# Altium PCB StepperSMPS.PcbDoc
Units mm, origin at the board's own origin, x right, y up, seen from the top; angles counter-clockwise.
Board outline 476.06 x 209.87 mm, 2 copper layers (Top Layer, Bottom Layer); 43 components, 27 nets, 129 pads, 0 vias.
Unrouted connection lines stored in the file: 27.
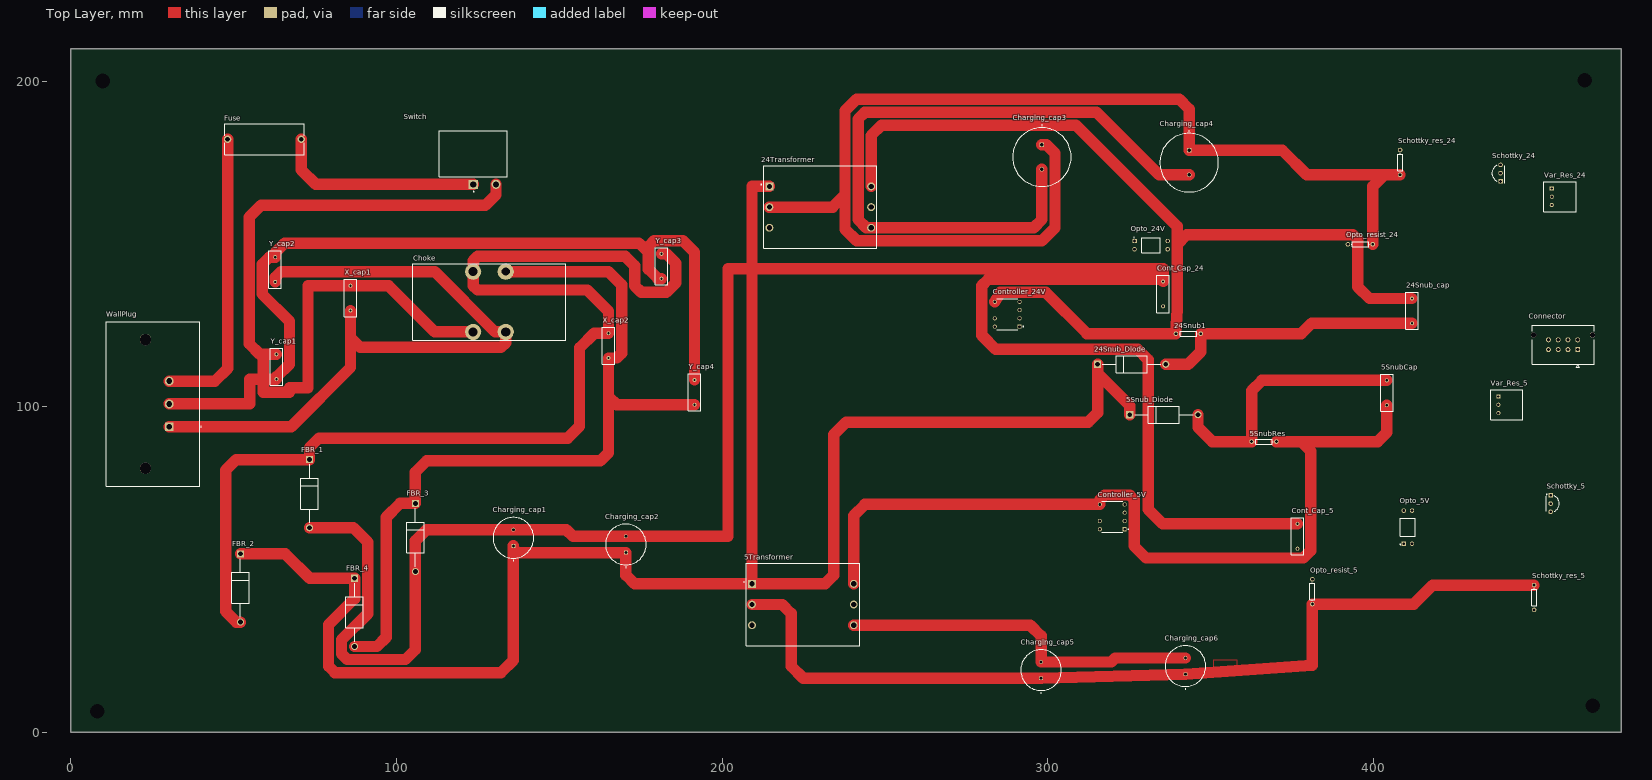
[diagram p0: Top Layer view]
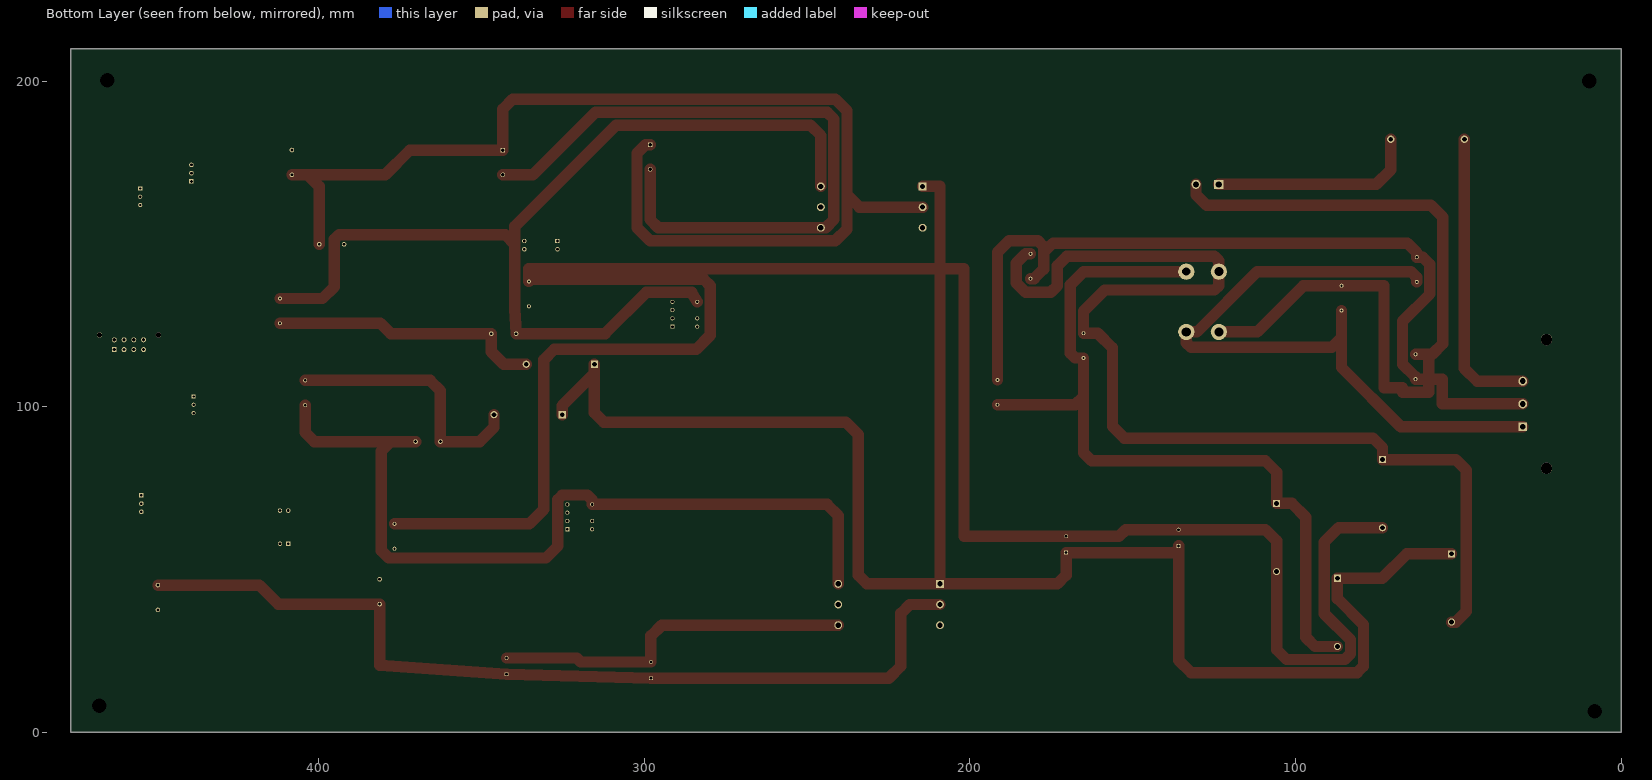
[diagram p1: Bottom Layer view, seen from below]

## Layer stack, top to bottom
Top Solder: solder mask 0.0102, Solder Resist, Dk 3.5
Top Layer: signal copper 0.0356
Dielectric 1: dielectric 0.32, FR-4, Dk 4.8
Bottom Layer: signal copper 0.0356
Bottom Solder: solder mask 0.0102, Solder Resist, Dk 3.5

## Board outline
476.059,0 476.059,209.867 0,209.867 0,0

## Design rules (kind name [scope] priority, off if disabled: settings)
BoardOutlineClearance [All] p1: gap=0.305 ignorepadtopadclearanceinfootprint=FALSE
Clearance [All] p1: gap=0.508 ignorepadtopadclearanceinfootprint=TRUE except(0.61: Arc-Via Track-Via SMDPad-Via THPad-Via Via-Via Via-Fill Via-Poly Via-Region Via-Text Via-Hole)
DiffPairsRouting [All] p1: maxlimit=0.254 minlimit=0.178 mostfreqgap=0.254 toplayer_minwidth=0.152 toplayer_maxwidth=0.381 toplayer_prefwidth=0.203 bottomlayer_minwidth=0.152 bottomlayer_maxwidth=0.381 bottomlayer_prefwidth=0.203 maxuncoupledlength=12.7
HoleSize [All] p1: absolutevalues=TRUE maxlimit=25.4 minlimit=1 maxpercent=80.000 minpercent=20.000
HoleToHoleClearance [All] p1: gap=0.432 allowstackedmicrovias=TRUE
PolygonConnect [All] p1: connectstyle=Relief reliefconductorwidth=0.254 reliefentries=4 polygonreliefangle="90 Angle" airgapwidth=0.254
RoutingLayers [All] p1: top layer_v5=TRUE bottom layer_v5=FALSE
RoutingVias [All] p1: holewidth=0.762 width=0.889 viastyle="Through Hole" minholewidth=0.254 minwidth=0.279 maxholewidth=6.477 maxwidth=6.35
SilkToSilkClearance [All] p1: silktosilkclearance=0
SolderMaskExpansion SolderMaskExpansion_1 [All] p1: expansion=0.102 istentingtop=FALSE
Width [All] p1: maxlimit=254 minlimit=0.762 preferedwidth=3.5 toplayer_minwidth=1 bottomlayer_prefwidth=1.27 minimp=50.000000 maximp=50.000000 favimp=50.000000
25 further rules are at their usual default settings.

## Components (designator, comment, footprint, x,y, rotation, side; value= is the part's Value field where it differs from the comment)
5Snub_Diode "1N5408G-T" FP-DO-201AD-MFG 335.661,97.536 r0 top
5SnubCap "Cap" RAD-0.3 404.114,104.267 r270 top value=1uF
5SnubRes "Res1" AXIAL-0.3 366.395,89.281 r0 top value=1K
5Transformer "PC-34-25" XFMR_PC-34-25 224.79,39.243 r0 top
24Snub1 "Res1" AXIAL-0.3 343.154,122.428 r180 top value=1K
24Snub_cap "Cap" RAD-0.3 411.861,129.413 r90 top value=1uF
24Snub_Diode "1N5408G-T" FP-DO-201AD-MFG 325.755,113.03 r0 top
24Transformer "PC-34-25" XFMR_PC-34-25 230.124,161.29 r0 top
Charging_cap1 "EEUED2W100" CAPPRD500W60D1250H2000 135.89,59.73 r90 top
Charging_cap2 "EEUED2W100" CAPPRD500W60D1250H2000 170.434,57.698 r90 top
Charging_cap3 "EEUED2G680" CAPPRD750W80D1800H3150 298.196,176.657 r270 top
Charging_cap4 "EEUED2G680" CAPPRD750W80D1800H3150 343.408,174.939 r270 top
Charging_cap5 "EEUED2W100" CAPPRD500W60D1250H2000 297.942,19.09 r90 top
Charging_cap6 "EEUED2W100" CAPPRD500W60D1250H2000 342.265,20.32 r90 top
Choke "7448263505" WE-CMB-XXL 128.524,132.207 r0 top
Connector "452800801" MOLEX_452800801 462.74,117.523 r0 top
Cont_Cap_5 "Cap" RAD-0.3 376.682,60.198 r90 top value=100pF
Cont_Cap_24 "Cap" RAD-0.3 335.407,134.62 r90 top value=100pF
Controller_5V "TNY268PN" DIP762W46P254L957H406Q7 319.786,66.167 r180 top
Controller_24V "TNY268PN" DIP762W46P254L957H406Q7 287.528,128.397 r180 top
FBR_1 "1N5408G-T" FP-DO-201AD-MFG 73.279,73.279 r270 top
FBR_2 "1N5408G-T" FP-DO-201AD-MFG 52.07,44.323 r270 top
FBR_3 "1N5408G-T" FP-DO-201AD-MFG 105.791,59.817 r270 top
FBR_4 "1N5408G-T" FP-DO-201AD-MFG 87.122,36.83 r270 top
Fuse "696108003002" 696108003002 59.436,182.118 r0 top
Opto_5V "VO617A-7X016" DIP1016W50P254L458H480Q4 410.591,62.992 r90 top
Opto_24V "VO617A-7X016" DIP1016W50P254L458H480Q4 331.724,149.606 r0 top
Opto_resist_5 "Res1" AXIAL-0.3 381.254,43.18 r270 top value=1K
Opto_resist_24 "Res1" AXIAL-0.3 395.986,149.86 r0 top value=1K
Schottky_5 "TL431CLP" LP0003A 454.406,70.231 r0 top
Schottky_24 "TL431CLP" LP0003A 439.039,171.704 r180 top
Schottky_res_5 "Res1" AXIAL-0.3 449.326,41.402 r90 top value=1K
Schottky_res_24 "Res1" AXIAL-0.3 408.178,175.006 r270 top value=1K
Switch "R1966ABLKBLKGR" SW_R1966ABLKBLKGR 123.556,168.275 r180 top
Var_Res_5 "3352T-1-103LF" FP-3352T-MFG 440.944,100.584 r270 top
Var_Res_24 "3352T-1-103LF" FP-3352T-MFG 457.327,164.465 r270 top
WallPlug "703W-00/52" FP-703W-00-52-MFG 25.146,100.838 r270 top
X_cap1 "Cap" RAD-0.3 85.852,133.35 r90 top value=6.6uF
X_cap2 "Cap" RAD-0.3 165.1,118.745 r90 top value=6.6uF
Y_cap1 "Cap" RAD-0.3 63.119,112.268 r90 top value=1100pF
Y_cap2 "Cap" RAD-0.3 62.738,142.113 r90 top value=1100pF
Y_cap3 "Cap" RAD-0.3 181.356,143.129 r90 top value=1100pF
Y_cap4 "Cap" RAD-0.3 191.516,104.394 r90 top value=1100pF

## Footprints (in the part's own frame and the unit in brackets; to place one, negate y for a bottom-side part, rotate by r counter-clockwise, add the part's x,y. Pads: shape width x height; smd on the part's side, far side on the other; paste and mask are expansions set on the pad)
696108003002 [mm] "FUSEHOLDER BLOCKS - PCB - CLIP COVER - THT"
  round 2.25 hole 1.5: 1(-11.3,0) 2(11.3,0)
  silkscreen extent -12.2,-4.7 12.2,4.7, body extent -12.2,-4.7 12.2,4.7, height 11.55
AXIAL-0.3 [mm] "Axial Device, Thru-Hole; 2 Leads; 0.3 in Pin Spacing"
  round 1.4 hole 0.85: 1(-3.81,0) 2(3.81,0)
  silkscreen extent -2.77,-0.76 2.77,0.76
CAPPRD500W60D1250H2000 [mm]
  round 1.2 hole 0.85: N(2.5,0)
  rect 1.2x1.2 hole 0.85: P(-2.5,0)
  silkscreen extent -7.1,-6.25 6.25,6.25, body extent -6.25,-6.25 6.25,6.25, height 20
CAPPRD750W80D1800H3150 [mm]
  round 1.4 hole 1.05: N(3.75,0)
  rect 1.4x1.4 hole 1.05: P(-3.75,0)
  silkscreen extent -9.85,-9 9,9, body extent -9,-9 9,9, height 31.5
DIP762W46P254L957H406Q7 [mm]
  rect 1.25x1.25 hole 0.83: 1(-3.81,3.81)
  round 1.25 hole 0.83: 2(-3.81,1.27) 3(-3.81,-1.27) 4(-3.81,-3.81) 5(3.81,-3.81) 7(3.81,1.27) 8(3.81,3.81)
  silkscreen extent -5.02,-4.79 3.18,4.79, body extent -4.72,-4.53 4.72,4.53, height 4.06
DIP1016W50P254L458H480Q4 [mm]
  rect 1.35x1.35 hole 0.85: 1(-5.08,1.27)
  round 1.35 hole 0.85: 2(-5.08,-1.27) 3(5.08,-1.27) 4(5.08,1.27)
  silkscreen extent -5.37,-2.29 2.8,2.43, body extent -5.21,-2.29 5.21,2.29, height 1.75
FP-703W-00-52-MFG [mm]
  rect 2.75x2.75 hole 1.8 paste-1000 mask+0: 1(7,5.05)
  round 2.75 hole 1.8 paste-1000 mask+0: 2(0,5.05) 3(-7,5.05)
  round 3.5 hole 3.5 unplated paste-1000 mask+0: ""(-19.75,-2.25) ""(19.75,-2.25)
  silkscreen extent -25.3,-14.35 25.3,14.93, body extent -25.4,-14.45 25.4,14.45, height 0.25
FP-3352T-MFG [mm]
  rect 1.25x1.25 hole 0.75 paste-1000 mask+0: 1(-2.54,-2.555)
  round 1.25 hole 0.75 paste-1000 mask+0: 2(0,-2.555) 3(2.54,-2.555)
  silkscreen extent -4.57,-4.95 4.57,4.95, body extent -4.67,-5.05 4.67,5.05, height 0.25
FP-DO-201AD-MFG [mm]
  rect 2.2x2.2 hole 1.45 paste-1000 mask+0: 1(-10.47,0)
  round 2.2 hole 1.45 paste-1000 mask+0: 2(10.47,0)
  silkscreen extent -8.97,-2.65 8.97,2.65, body extent -11.67,-2.75 11.67,2.75, height 0.25
LP0003A [mm] "TO, Flat Index; 3 In-Line, Formed Axial Leads; Body Dia. 4.8mm; Leads 0.56 x 0.41 mm (max)"
  rrect7% 1.4x1.4 hole 0.8: 1(0,2.54)
  round 1.4 hole 0.8: 2(0,0) 3(0,-2.54)
  silkscreen extent -1.35,-2.41 2.65,2.95, body extent -1.33,-2.83 2.35,2.83, height 9.01
MOLEX_452800801 [mm]
  rect 1.505x1.505 hole 1.005 mask+0.076: 1(0,0)
  round 1.505 hole 1.005 mask+0.076: 2(-3,0) 3(-6,0) 4(-9,0) 5(0,3) 6(-3,3) 7(-6,3) 8(-9,3)
  round 1.57 hole 1.57 unplated mask+0.076: ""(-13.5,4.45) ""(4.5,4.45)
  silkscreen extent -14,-5.49 5,7.45
RAD-0.3 [mm] "Radial Cap, Thru-Hole; 2 Leads; 0.3 in Pin Spacing"
  round 1.2 hole 0.7: 1(-3.81,0) 2(3.81,0)
  silkscreen extent -5.71,-1.91 5.71,1.91
SW_R1966ABLKBLKGR [mm]
  rect 2.775x2.775 hole 1.85: 1(0,0)
  round 2.775 hole 1.85: 1A(-7,0)
  silkscreen extent -10.4,-16.4 10.4,2.35, body extent -10.47,-22.2 10.47,0.6, height 14.8
WE-CMB-XXL [mm] "THT Inductor, 4-Leads, Body 43.5 x 23.5 mm"
  round 5 hole 2.8: 1(-5,-9.25) 6(5,-9.25) 12(-5,9.25)
  round 5 hole 2.5: 7(5,9.25)
  silkscreen extent -23.5,-11.75 23.5,11.75, body extent -20.64,-11.7 20.64,11.8, height 41
XFMR_PC-34-25 [mm]
  rect 2.43x2.43 hole 1.62: 1(-15.621,6.35)
  round 2.43 hole 1.62: 2(15.621,6.35) 3(-15.621,0) 4(-15.621,-6.35) 5(15.621,0) 6(15.621,-6.35)
  silkscreen extent -18.2,-12.7 17.4,12.7, body extent -5.74,-39 28.93,-13.6, height 30.56

## Part data
5Snub_Diode 24Snub_Diode FBR_1 FBR_2 FBR_3 FBR_4: library part CMP-12791-000058-1, "DIODE GEN PURP 1KV 3A DO201AD", Average Rectified Current=3A, Capacitance=40pF, Case/Package=DO-201AD, Forward Voltage=1.1V, Max Operating Temperature=150°C, Max Repetitive Reverse Voltage (Vrrm)=1kV, Max Reverse Current=5uA, Max Surge Current=125A, Min Operating Temperature=-65°C, Package Quantity=1200, Current Rating=3A, Element Configuration=Single, Forward Current=3A, Height=5.3mm, Lead Free="Lead Free", Length=9.5mm, Max Reverse Voltage (DC)=1kV, Mount="Through Hole", Number of Pins=2, Output Current=3A, Packaging="Tape and Reel", Peak Non-Repetitive Surge Current=125A, Polarity=Standard, Radiation Hardening=No, Recovery Time=2us, Reverse Recovery Time=2us, Reverse Voltage (DC)=1kV, RoHS Compliant=Yes, Series=-, Voltage Rating (DC)=1kV, Weight=0.038801oz, Width=5.3mm
5SnubCap 24Snub_cap Cont_Cap_5 Cont_Cap_24 X_cap1 X_cap2 Y_cap1 Y_cap2 Y_cap3 Y_cap4: "Capacitor", LatestRevisionDate=17-Jul-2002, LatestRevisionNote="Re-released for DXP Platform.", PackageDescription="Radial Cap, Thru-Hole; 2 Leads; 0.3 in Pin Spacing", PackageReference=RAD-0.3, Published=8-Jun-2000, Publisher="Altium Limited"
5SnubRes 24Snub1 Opto_resist_5 Opto_resist_24 Schottky_res_5 Schottky_res_24: "Resistor", LatestRevisionDate=17-Jul-2002, LatestRevisionNote="Re-released for DXP Platform.", PackageDescription="Axial Device, Thru-Hole; 2 Leads; 0.3 in Pin Spacing", PackageReference=AXIAL-0.3, Published=8-Jun-2000, Publisher="Altium Limited"
5Transformer 24Transformer: "Low Power Miniature Transformer", Package=None, Availability=Unavailable, MF="{'manufacturer': u'Signal Transformer'}", MP=PC-34-25, Price=None
Charging_cap1 Charging_cap2 Charging_cap3 Charging_cap4 Charging_cap5 Charging_cap6: "ED-A", Package=None, Availability=Unavailable, Price=None
  Charging_cap1 Charging_cap2 Charging_cap5 Charging_cap6: MF="{'manufacturer': u'Panasonic Electronic'}", MP=EEUED2W100
  Charging_cap3 Charging_cap4: MF="{'manufacturer': u'Panasonic'}", MP=EEUED2G680
Choke: library part CMP-0223-00098-1, "THT Common Mode Power Line Choke WE-CMB, L = 0.50 mH", Inductance="0.50 mH", ComponentLink1Description="Manufacturer Link", ComponentLink1URL=http://www.we-online.com, ComponentLink2Description=Datasheet, ComponentLink2URL=http://www.we-online.de/katalog/media/pdf/7448263505.pdf, DatasheetVersion="ver 2, Aug-2008", PackageDescription="THT Inductor, 4-Leads, Body 43.5 x 23.5 mm", PackageReference=WE-CMB-XXL, PackageVersion=2008
Connector Opto_5V Opto_24V Switch: Package=None, Availability=Unavailable, Price=None
  Connector: MF="{'manufacturer': u'Molex'}", MP=452800801
  Opto_5V Opto_24V: MF="{'manufacturer': u'Vishay'}", MP=VO617A-7X016
  Switch: MF="{'manufacturer': u'E-Switch'}", MP=R1966ABLKBLKGR
Controller_5V Controller_24V: "Converter Offline Flyback Topology 132kHz DIP-8B", Package=None, Availability=Unavailable, MF="{'manufacturer': u'Power Integrations'}", MP=TNY268PN, Price=None
Fuse: library part CMP-1502-00237-1, "WR-FSH Fuse Holder Blocks Fuse Holder Blocks Clip Cover for PCB", Manufacturer="Wurth Elektronik", Operating Temperature=-30to120degC, Datasheet URL=https://katalog.we-online.de/em/datasheet/696108003002.pdf, Fuse Size=5x20mm, Manufacturer URL=http://www.we-online.de, Mounting Technology=THT, Package Reference=696108003002, Packaging=Box, Part Number=696108003002, Publisher=WurthElektronik
Schottky_5 Schottky_24: library part CMP-0366-00032-2, "Adjustable Precision Shunt Regulator, 34 ppm / degC, 100 mA, 0 to 70 degC, 3-pin TO-92 (LP), Pb-Free (RoHS)", Manufacturer="Texas Instruments", Rating=Military, Temp Coeff(Max)(ppm/ degree C)=92, Temp Coeff(Typ)(ppm/ degree C)=34, Code_JEDEC=TO-226, ComponentLink1Description="Manufacturer URL", ComponentLink1URL=http://www.ti.com/, ComponentLink2Description=Datasheet, ComponentLink2URL=http://www.ti.com/general/docs/lit/getliterature.tsp?genericPartNumber=TL431&fileType=pdf, ComponentLink3Description="Package Specification", ComponentLink3URL=http://www.ti.com/litv/pdf/msot002a, DatasheetVersion=SLVS543M, Eco-Plan="Pb-Free (RoHS)", Initial Accuracy @ 25/deg C(%)=2, Iout/Iz(Max)(mA)=100, Min Iz for Regulation(uA)=600, Mounting Technology="Through Hole", PackageDescription="Plastic Cylindrical Package, Formed Lead Option (TO-92)", PackageReference=LP0003A, PackageVersion=4040001-2/C, PartNumber=TL431CLP, SubFamily="Shunt Voltage Reference", VO Adj(Max)(V)=36, VO Adj(Min)(V)=2.495
Var_Res_5 Var_Res_24: library part CMP-07234-000038-1, "THUMBWHEEL POT 10K OHM 0.5W TOP", Color=Black, Max Operating Temperature=125°C, Max Power Dissipation=500mW, Min Operating Temperature=-55°C, Package Quantity=100, Resistance=10kR, Resistance Tolerance=20%, Resistor Type=Cermet, Temperature Coefficient=100ppm/°C, Voltage Rating=250V, Contact Plating=Tin, Depth=9.53mm, Diameter=8.89mm, Height=0.15inch, Lead Free="Lead Free", Length=8.89mm, Military Standard=Not, Mount="Through Hole", Number of Turns=1, Packaging=Bag, Power Rating=500mW, Radiation Hardening=No, REACH SVHC="No SVHC", RoHS Compliant=Yes, Series="Trimpot® 3352 - Open Frame", Taper=Linear, Technology=CERMET, Termination=Pin, Tolerance=20%, Weight=0.01oz, Width=8.89mm
WallPlug: library part CMP-64678-000001-1, "PWR ENT RCPT IEC320-C14 PNL SLDR", Color=Black, Current=15A, Max Voltage Rating (AC)=250V, Package Quantity=100, Approvals=UL, Connector Type=Receptacle, Contact Plating=Tin, Current Rating=15A, Fuse=No, Gender=Receptacle, Housing Material=Thermoplastic, Lead Free="Lead Free", Max Current Rating=15A, Mount="Through Hole", Number of Contacts=3, Number of Poles=2, Number of Positions=3, Orientation="Right Angle", Packaging=Bulk, Panel Thickness=0.12inch, Pitch=7mm, REACH SVHC="No SVHC", Termination=Solder, Voltage Rating=250V, Voltage Rating (AC)=250V, Voltage Rating (DC)=250V

## Free pads (board coordinates)
  round 1.524 hole 4.5: 1(8.128,6.477) 1(9.779,200.025) 1(464.947,200.279) 1(467.36,8.128)

## Nets (pads, with @x,y where several pads share a name; then routed paths per layer and width w, separated by ;. In a path a pad name is that pad's centre, name@x,y a point inside that pad or via, vN(x,y) a via of type N, cw(c..) or ccw(c..) an arc to the next point about the centre after c; other vN are vias at no path point)
5V_rail: 5Transformer.3 Charging_cap5.P Charging_cap6.P Connector.3 Connector.4 Opto_resist_5.2 Schottky_res_5.2 | length 280.3
  Top Layer w3.5: 5Transformer.3 218.44,39.243 221.183,36.5 221.183,20.32 224.917,16.586 297.942,16.586 Charging_cap5.P 342.265,17.805 Charging_cap6.P 381.254,20.599 Opto_resist_5.2 412.369,39.37 418.211,45.212 Schottky_res_5.2
24V_rail: 24Transformer.3 Charging_cap3.P Charging_cap4.P Connector.1 Connector.2 Opto_resist_24.2 Schottky_res_24.2 | length 368.6
  Top Layer w3.5: 24Transformer.3 233.909,161.29 237.719,165.1 ; Charging_cap3.P 299.602,180.407 302.209,177.8 302.209,154.94 298.196,150.927 241.3,150.927 237.719,154.508 237.719,165.1 ; Opto_resist_24.2 399.796,167.64 403.352,171.196 ; Schottky_res_24.2 403.352,171.196 ; 237.719,165.1 237.719,190.881 241.3,194.462 340.36,194.462 343.408,191.414 Charging_cap4.P 372.034,178.689 379.527,171.196 403.352,171.196
GND: Connector.6 Connector.7 Connector.8 Opto_5V.3 Opto_24V.3 Schottky_5.2 Schottky_24.2 Var_Res_5.2 Var_Res_24.2 WallPlug.2 Y_cap1.1 Y_cap2.2 Y_cap3.1 Y_cap4.2 | length 272.1
  Top Layer w3.5: WallPlug.2 54.864,100.838 54.864,108.458 Y_cap1.1 63.119,109.22 63.322,109.22 67.132,113.03 67.132,126.213 58.725,134.62 58.725,143.688 60.96,145.923 Y_cap2.2 62.738,147.32 65.641,150.223 174.44,150.223 177.343,147.32 ; Y_cap3.1 180.264,139.319 177.343,142.24 177.343,147.32 ; Y_cap4.2 191.516,147.396 187.96,150.952 179.07,150.952 177.343,149.225 177.343,147.32
L_to_FBR: Choke.12 FBR_1.1 FBR_2.2 X_cap2.2 Y_cap3.2 | length 343.6
  Top Layer w3.5: FBR_2.2 50.8,33.853 47.498,37.155 47.498,80.447 50.8,83.749 FBR_1.1 73.279,87.427 76.2,90.348 152.568,90.348 156.2,93.98 156.2,118.053 160.702,122.555 X_cap2.2 165.1,129.31 158.584,135.826 124.858,135.826 123.524,137.16 Choke.12 123.524,144.78 124.959,146.215 170.18,146.215 173.121,143.274 173.121,137.16 175.153,135.128 182.88,135.128 185.728,137.976 185.728,144.091 182.88,146.939 Y_cap3.2
N_to_FBR: Choke.7 FBR_3.1 FBR_4.2 X_cap2.1 Y_cap4.1 | length 249.3
  Top Layer w3.5: FBR_4.2 93.98,26.36 96.83,29.21 96.83,66.04 101.077,70.287 FBR_3.1 105.791,79.908 109.22,83.337 162.56,83.337 165.1,85.877 165.1,103.124 ; Choke.7 165.1,141.457 169.113,137.444 169.113,116.408 167.64,114.935 X_cap2.1 165.1,103.124 ; Y_cap4.1 167.64,100.584 165.1,103.124
Net5Snub_Diode_1: 5Snub_Diode.1 5Transformer.1 24Snub_Diode.1 24Transformer.1 Charging_cap1.P Charging_cap2.P FBR_2.1 FBR_4.1 | length 556.8
  Top Layer w3.5: FBR_2.1 65.837,54.793 73.33,47.3 FBR_4.1 87.122,41.046 79.096,33.02 79.096,20.32 81.077,18.339 132.08,18.339 135.89,22.149 135.89,56.468 ; Charging_cap1.P 135.89,56.468 ; 24Transformer.1 209.169,167.64 5Transformer.1 ; 24Snub_Diode.1 315.285,110.236 ; 5Snub_Diode.1 325.191,100.33 315.285,110.236 ; 135.89,56.468 137.16,55.198 Charging_cap2.P 170.434,48.26 173.101,45.593 5Transformer.1 ; 5Transformer.1 231.623,45.593 234.29,48.26 234.29,91.44 238.1,95.25 312.42,95.25 315.285,98.115 315.285,110.236
Net5Snub_Diode_2: 5Snub_Diode.2 5SnubCap.1 5SnubRes.1 | length 80.6
  Top Layer w3.5: 5Snub_Diode.2 346.131,93.67 350.52,89.281 5SnubRes.1 362.585,104.902 365.76,108.077 5SnubCap.1
Net5SnubCap_2: 5SnubCap.2 5SnubRes.2 5Transformer.2 Controller_5V.5 | length 260.2
  Top Layer w3.5: 5Transformer.2 240.411,66.548 243.84,69.977 Controller_5V.5 315.976,71.349 317.5,72.873 325.12,72.873 326.492,71.501 326.492,57.226 330.2,53.518 378.46,53.518 380.695,55.753 380.695,86.36 377.774,89.281 ; 5SnubRes.2 377.774,89.281 ; 5SnubCap.2 404.114,92.075 401.32,89.281 377.774,89.281
Net5Transformer_6: 5Transformer.6 Charging_cap5.N Charging_cap6.N | length 111.7
  Top Layer w3.5: 5Transformer.6 294.64,32.893 297.942,29.591 Charging_cap5.N 319.481,21.59 320.711,22.82 Charging_cap6.N
Net24Snub1_1: 24Snub1.1 24Snub_cap.1 24Snub_Diode.2 | length 84.1
  Top Layer w3.5: 24Snub_Diode.2 343.154,113.03 346.964,116.84 24Snub1.1 377.825,122.428 381,125.603 24Snub_cap.1
Net24Snub1_2: 24Snub1.2 24Snub_cap.2 24Transformer.2 Controller_24V.5 | length 309.2
  Top Layer w3.5: 24Transformer.2 245.745,183.251 248.92,186.426 308.671,186.426 339.75,155.346 339.75,149.86 ; Controller_24V.5 285.458,135.09 299.354,135.09 312.016,122.428 24Snub1.2 339.75,129.972 339.75,149.86 ; 24Snub_cap.2 398.78,133.223 395.148,136.855 395.148,151.384 393.7,152.832 342.722,152.832 339.75,149.86
Net24Transformer_6: 24Transformer.6 Charging_cap3.N Charging_cap4.N | length 215.4
  Top Layer w3.5: Charging_cap3.N 298.196,157.48 295.656,154.94 24Transformer.6 244.272,154.94 241.732,157.48 241.732,188.326 243.84,190.434 314.96,190.434 334.205,171.189 Charging_cap4.N
NetCharging_cap1_N: Charging_cap1.N Charging_cap2.N Cont_Cap_5.2 Cont_Cap_24.2 Controller_5V.2 Controller_24V.2 FBR_1.2 FBR_3.2 | length 652.9
  Top Layer w3.5: FBR_1.2 86.746,62.809 91.135,58.42 91.135,36.424 83.114,28.402 83.114,24.13 84.892,22.352 102.743,22.352 105.791,25.4 FBR_3.2 105.791,58.801 109.22,62.23 Charging_cap1.N 152.146,62.23 154.178,60.198 Charging_cap2.N 201.778,60.198 201.778,142.316 335.407,142.316 335.407,139.098 ; Cont_Cap_24.2 335.407,139.098 ; Cont_Cap_5.2 335.28,64.008 330.81,68.478 330.81,114.427 327.66,117.577 284.048,117.577 279.705,121.92 279.705,137.16 281.643,139.098 335.407,139.098
NetChoke_1: Choke.1 Switch.1A X_cap1.2 Y_cap1.2 | length 245.1
  Top Layer w3.5: Y_cap1.2 59.106,116.078 ; Choke.1 111.76,122.957 97.557,137.16 X_cap1.2 72.822,137.16 72.822,105.766 67.132,105.766 67.132,104.445 59.106,104.445 59.106,116.078 ; Switch.1A 130.556,165.1 127.305,161.849 58.42,161.849 54.712,158.14 54.712,119.38 58.014,116.078 59.106,116.078
NetChoke_6: Choke.6 WallPlug.1 X_cap1.1 Y_cap2.1 | length 214.2
  Top Layer w3.5: WallPlug.1 67.658,93.838 85.852,112.032 85.852,121.234 ; Y_cap2.1 62.738,139.7 64.516,141.478 111.76,141.478 130.281,122.957 Choke.6 133.524,119.63 132.08,118.186 88.9,118.186 85.852,121.234 ; X_cap1.1 85.852,121.234
NetCont_Cap_5_1: Cont_Cap_5.1 Controller_5V.1
NetCont_Cap_24_1: Cont_Cap_24.1 Controller_24V.1
NetController_5V_4: Controller_5V.4 Opto_5V.4
NetController_24V_4: Controller_24V.4 Opto_24V.4
NetFuse_1: Fuse.1 WallPlug.3 | length 89.9
  Top Layer w3.5: WallPlug.3 44.214,107.838 48.136,111.76 Fuse.1
NetFuse_2: Fuse.2 Switch.1 | length 64.1
  Top Layer w3.5: Fuse.2 70.736,172.72 75.181,168.275 Switch.1
NetOpto_5V_1: Opto_5V.1 Opto_resist_5.1
NetOpto_5V_2: Opto_5V.2 Schottky_5.3
NetOpto_24V_1: Opto_24V.1 Opto_resist_24.1
NetOpto_24V_2: Opto_24V.2 Schottky_24.3
NetSchottky_5_1: Schottky_5.1 Schottky_res_5.1 Var_Res_5.1
NetSchottky_24_1: Schottky_24.1 Schottky_res_24.1 Var_Res_24.1
pads on no net: 5Transformer.4 5Transformer.5 24Transformer.4 24Transformer.5 Connector. Connector.5 Controller_5V.3 Controller_5V.7 Controller_5V.8 Controller_24V.3 Controller_24V.7 Controller_24V.8 Var_Res_5.3 Var_Res_24.3 WallPlug.

## Polygon pours and split planes (outlines as drawn)
NetSchottky_5_1 on Top Layer "NONET_L01_P000" (solid, shelved, pour order 0): 351.028,22.225 358.013,22.225 358.013,17.907 351.028,17.907